# EAGLE board circuit41 (EAGLE 9.2.2)
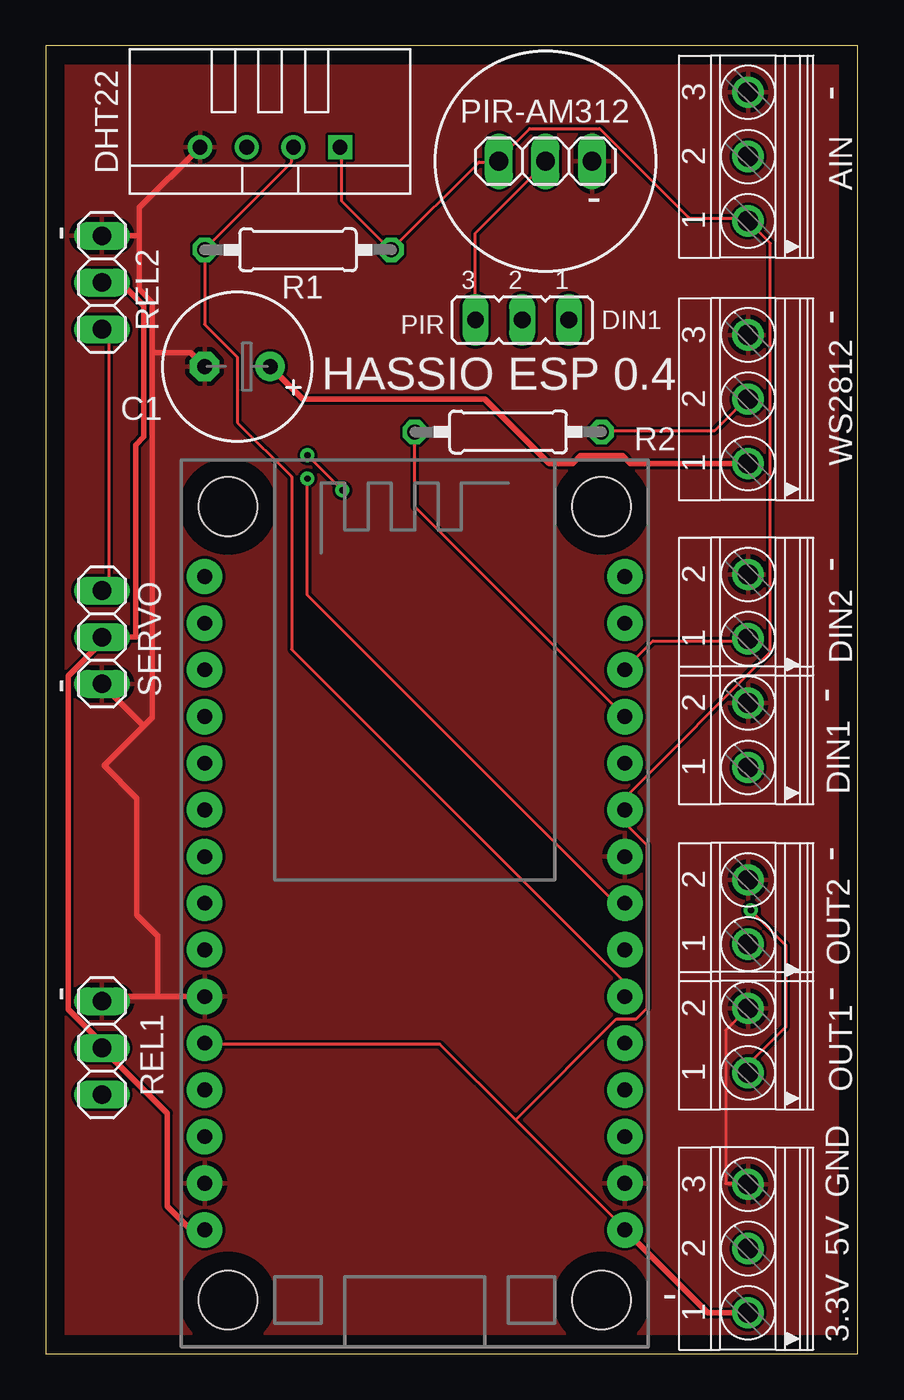
[diagram p0: board, top side]
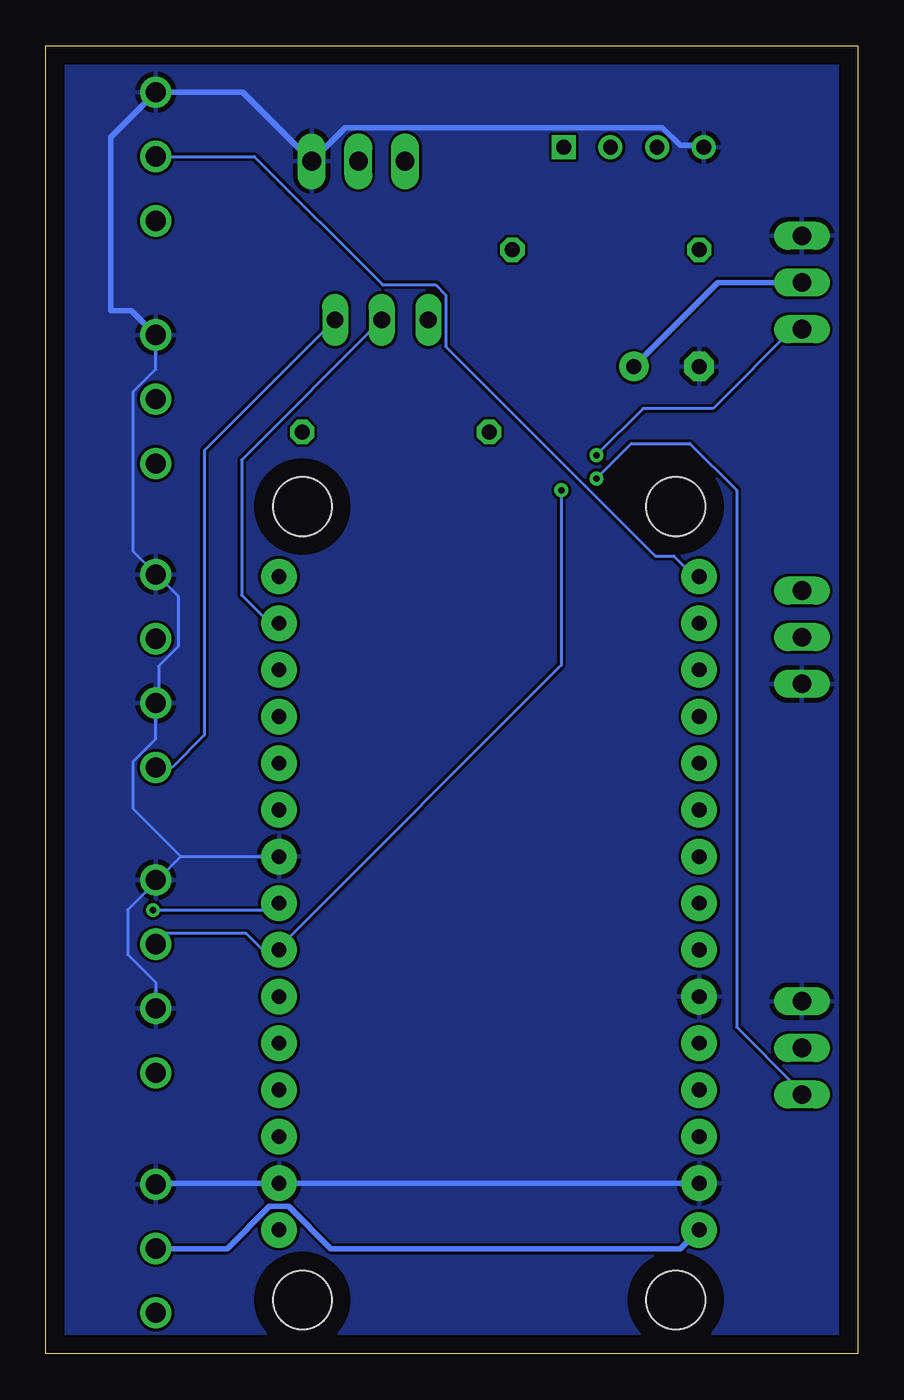
[diagram p1: board, bottom side, seen from below]

Size 44.18 x 71.17 mm. Coordinates in mm from the lower left corner, seen from the top.
Outline: 0,0 44.18,0 44.18,71.17 0,71.17 0,0
Copper layers (1*16): Top 0.035mm / dielectric 1.5mm / Bottom 0.035mm
Design rules "default": minimum track width 6mil, minimum drill 0.35mm, track to track 6mil, track to pad 6mil, pad to pad 6mil, via to via 6mil, smd to smd 6mil, copper to edge 40mil, drill to drill 6mil, minimum pad ring 10mil, minimum via ring 8mil, stop-mask expansion 4mil, vias tented up to drill 0mil, thermal gap 10mil

## Footprints (pad centres in the part's own frame; a part is rotated, then mirrored left to right if it is on the bottom)
1751251 = drill 1.1 pad 1.7: 1 -3.5,-0.1; 2 0,-0.1; 3 3.5,-0.1
E3,5-8 = drill 0.813 pad 1.6: + -1.778,0 | drill 0.813 pad 1.6 octagon: - 1.778,0
TEMP-HUM-SENSOR-DHT22 = drill 0.8 square: 1 -3.81,0 | drill 0.8: 2 -1.27,0; 3 1.27,0; 4 3.81,0
1751248 = drill 1.1 pad 1.7: 1 -1.75,-0.1; 2 1.75,-0.1
JP2 = drill 0.914 long: 1 -2.54,0; 2 0,0; 3 2.54,0
1X03 = drill 1.016 long: 1 -2.54,0; 2 0,0; 3 2.54,0
0207/10 = drill 0.813 octagon: 1 -5.08,0; 2 5.08,0
ESP12E_DEVKIT = drill 0.8 pad 1.93: 3V3@0 -11.43,-7.62; 3V3@1 11.43,5.08; 3V3@2 11.43,-17.78; AD0 -11.43,17.78; CLK -11.43,-2.54; CMD -11.43,2.54; D0 11.43,17.78; D1 11.43,15.24; D2 11.43,12.7; D3 11.43,10.16; D4 11.43,7.62; D5 11.43,0; D6 11.43,-2.54; D7 11.43,-5.08; D8 11.43,-7.62; EN -11.43,-10.16; GND@0 -11.43,-5.08; GND@1 -11.43,-15.24; GND@2 11.43,2.54; GND@3 11.43,-15.24; RST -11.43,-12.7; RSV@0 -11.43,15.24; RSV@1 -11.43,12.7; RX 11.43,-10.16; SD0 -11.43,0; SD1 -11.43,5.08; SD2 -11.43,7.62; SD3 -11.43,10.16; TX 11.43,-12.7; VIN -11.43,-17.78 | hole 3.2: -10.16,21.59; 10.16,21.59; 10.16,-21.59; -10.16,-21.59

## Placement (x,y rotation side)
AIN  1751251  [1751251]  38.1,65.15 90 top
C1  1000uF  [E3,5-8]  10.41,53.72 180 top
DHT22  TEMP-HUM-SENSOR-DHT22  [TEMP-HUM-SENSOR-DHT22]  12.19,65.66 180 top
DIN1  1751248  [1751248]  38.1,33.66 90 top
DIN2  1751248  [1751248]  38.1,40.66 90 top
JP3  [JP2]  25.91,56.26 180 top
OUT1  1751248  [1751248]  38.1,17.03 90 top
OUT2  1751248  [1751248]  38.1,24.03 90 top
PIR-AM312  [1X03]  27.18,64.9 0 top
PWR  1751251  [1751251]  38.1,5.71 90 top
R1  10k  [0207/10]  13.72,60.07 180 top
R2  470  [0207/10]  25.15,50.16 0 top
REL1  [1X03]  3.05,16.64 270 top
REL2  [1X03]  3.05,58.29 270 top
SERVO  [1X03]  3.05,38.99 270 top
U$1  ESP12E_DEVKIT  [ESP12E_DEVKIT]  20.07,24.51 0 top
WS2812  1751251  [1751251]  38.1,51.94 90 top

## Library data of the parts
AIN DIN1 DIN2 OUT1 OUT2 PWR WS2812 = con-phoenix-350; OC_FARNELL: unknown; OC_NEWARK: unknown
C1 = rcl; SPICEPREFIX: C
DHT22 = diy-modules
JP3 = jumper
PIR-AM312 REL1 REL2 SERVO = pinhead
R1 R2 = eagle-ltspice; SPICEMODEL: NONE; SPICEPREFIX: R
U$1 = ESP12E_DEVKIT

## Nets
ANALOGIN: AIN.2 U$1.AD0
DHT-DATA: DHT22.2 R1.2 U$1.D7
DOUT: R2.2 WS2812.2
GND: AIN.3 C1.- DHT22.4 DIN1.2 DIN2.2 OUT1.2 OUT2.2 PIR-AM312.3 PWR.3 REL1.1 REL2.1 SERVO.3 U$1.GND@0 U$1.GND@1 U$1.GND@2 U$1.GND@3 WS2812.3
N$1: JP3.2 U$1.D1
N$2: DIN1.1 JP3.1
N$11: DIN2.1 U$1.D2
PIR-DATA: JP3.3 PIR-AM312.2
RELOUT1: OUT1.1 REL1.3 U$1.D5
RELOUT2: OUT2.1 REL2.3 SERVO.1 U$1.D6
VCC: AIN.1 DHT22.1 PIR-AM312.1 PWR.1 R1.1 U$1.3V3@0 U$1.3V3@1 U$1.3V3@2
VIN: C1.+ PWR.2 REL1.2 REL2.2 SERVO.2 U$1.VIN WS2812.1
WS-DATA: R2.1 U$1.D3

## Tracks (layer width: path | path; a pad name or v marks a point on that pad's centre or on a via)
ANALOGIN
  Bottom 0.152: U$1.AD0 8.89,42.29 10.01,43.41 11.02,43.41 22.43,54.82 22.43,57.62 22.98,58.17 25.86,58.17 32.84,65.15 AIN.2
DHT-DATA
  Top 0.152: DHT22.2 13.36,65.66 13.36,64.85 8.64,60.12 R1.2 | U$1.D7 31.5,20.19 13.36,38.33 13.36,47.73 10.41,50.67 10.41,54.23 8.64,56.01 R1.2 | 8.64,59.97 R1.2
DOUT
  Top 0.152: R2.2 30.28,50.22 36.37,50.22 38.05,51.89 WS2812.2
GND
  Top 0.152: 8.33,65.66 DHT22.4 | 31.5,9.22 U$1.GND@3 | 36.98,9.27 36.98,17.6 38.05,18.67 OUT1.2
  Top 0.2: 36.98,9.27 38.14,9.27 PWR.3
  Top 0.305: 6.1,19.43 U$1.GND@0 | 6.1,19.43 6.1,22.73 4.95,23.88 4.95,28.7 4.95,30.23 3.17,32 5.33,34.16 | SERVO.3 5.33,34.16 | 5.08,60.83 REL2.1 | DHT22.4 5.08,62.36 5.08,60.83 | 5.08,60.83 5.08,57.92 5.79,57.21 5.79,54.48 | 5.79,54.48 5.79,34.62 5.33,34.16 | 6.1,19.43 3.3,19.43 REL1.1 | C1.- 7.87,54.48 5.79,54.48
  Bottom 0.152: 8.38,65.76 DHT22.4 | OUT1.2 38.2,18.82 38.2,20.19 39.73,21.72 39.73,24.16 38.2,25.68 OUT2.2 38.05,25.83 36.83,27.05 | 36.83,27.05 U$1.GND@2 | 36.83,27.05 39.42,29.64 39.42,32.23 38.2,33.45 38.2,35.28 DIN1.2 38.05,35.43 38.05,37.41 36.98,38.48 36.98,41.22 38.05,42.29 DIN2.2 38.2,42.44 39.42,43.66 39.42,52.35 38.2,53.57 38.2,55.4 WS2812.3
  Bottom 0.305: U$1.GND@1 U$1.GND@3 38.14,9.27 PWR.3 | 8.38,65.76 9.67,65.76 10.63,66.73 27.89,66.73 PIR-AM312.3 33.47,68.65 AIN.3 40.64,66.21 40.64,56.77 39.53,56.77 WS2812.3
  pour Top: 0.25,70.99 43.94,70.99 43.94,0.13 0.25,0.13
  pour Bottom: 0.25,70.74 43.94,70.74 43.94,0.13 0.25,0.13
N$1
  Bottom 0.152: JP3.2 33.53,48.64 33.53,41.27 32,39.75 U$1.D1
N$2
  Bottom 0.152: JP3.1 35.56,49.15 35.56,33.66 37.31,31.91 DIN1.1
N$11
  Top 0.152: DIN2.1 38.05,38.79 33.02,38.79 31.5,37.26 U$1.D2
PIR-DATA
  Top 0.152: 27.23,64.54 27.23,64.85 | 27.23,64.85 PIR-AM312.2 | JP3.3 23.37,60.98 27.23,64.85
RELOUT1  (via drill 0.35)
  Top 0.152: v14.22,47.62 14.22,41.27 31.37,24.13 U$1.D5 | v38.35,24.13 40.26,22.23 40.26,17.78 38.35,15.88 OUT1.1
  Bottom 0.152: 38.05,15.16 OUT1.1 | v14.22,47.62 12.32,49.53 9.14,49.53 6.6,46.99 6.6,17.78 3.43,14.6 REL1.3 | v38.35,24.13 32,24.13 U$1.D5
RELOUT2  (via drill 0.35)
  Top 0.152: SERVO.1 3.43,41.91 3.43,55.25 REL2.3 | v14.22,48.9 v16.13,46.99
  Bottom 0.152: OUT2.1 37.72,22.86 33.27,22.86 32,21.59 U$1.D6 31.37,22.23 16.13,37.47 v16.13,46.99 | v14.22,48.9 11.68,51.44 7.87,51.44 3.43,55.88 REL2.3
VCC
  Top 0.152: DHT22.1 16.1,65.66 16.1,62.71 18.69,60.12 R1.1 23.57,64.85 24.64,64.85 PIR-AM312.1 24.64,65 26.31,66.67 30.12,66.67 35,61.8 38.05,61.8 | 38.05,61.8 AIN.1 | 25.55,12.72 31.5,6.78 U$1.3V3@2 | 25.55,12.72 21.44,16.84 8.64,16.84 U$1.3V3@0 | 25.55,12.72 31.04,18.21 32.11,18.21 32.72,18.82 32.72,27.66 31.5,28.88 U$1.3V3@1 31.5,30.25 39.42,38.18 39.42,60.43 38.05,61.8
  Top 0.305: U$1.3V3@2 36.01,2.21 PWR.1
  Bottom 0.152: 38.05,61.65 AIN.1 | 18.69,59.97 R1.1
VIN
  Top 0.152: 3.15,38.99 SERVO.2
  Top 0.305: U$1.VIN 7.87,6.73 6.6,8 6.6,13.08 REL1.2 3.05,16.91 1.22,18.73 1.22,36.89 3.05,38.72 SERVO.2 4.88,38.99 4.88,49.45 5.33,49.91 5.33,57.02 4.06,58.29 REL2.2 | C1.+ 13.97,51.94 23.88,51.94 27.38,48.44 28.65,48.44 29.08,48.87 31.37,48.87 31.8,48.44 WS2812.1
  Bottom 0.305: U$1.VIN 9.65,5.71 28.68,5.71 30.97,8 32.02,8 34.31,5.71 PWR.2 | C1.+ 7.62,58.29 REL2.2
WS-DATA
  Top 0.152: R2.1 20.07,46.1 U$1.D3

## Text on the board
tPlace: 3.3V 5V GND
tNames: - | - | - | PIR | DIN1 | - | HASSIO ESP 0.4 | - | - | - | - | - | - | -